# EAGLE board SimulatorT2MRSensorRevD_panel6 (EAGLE 7.7.0)
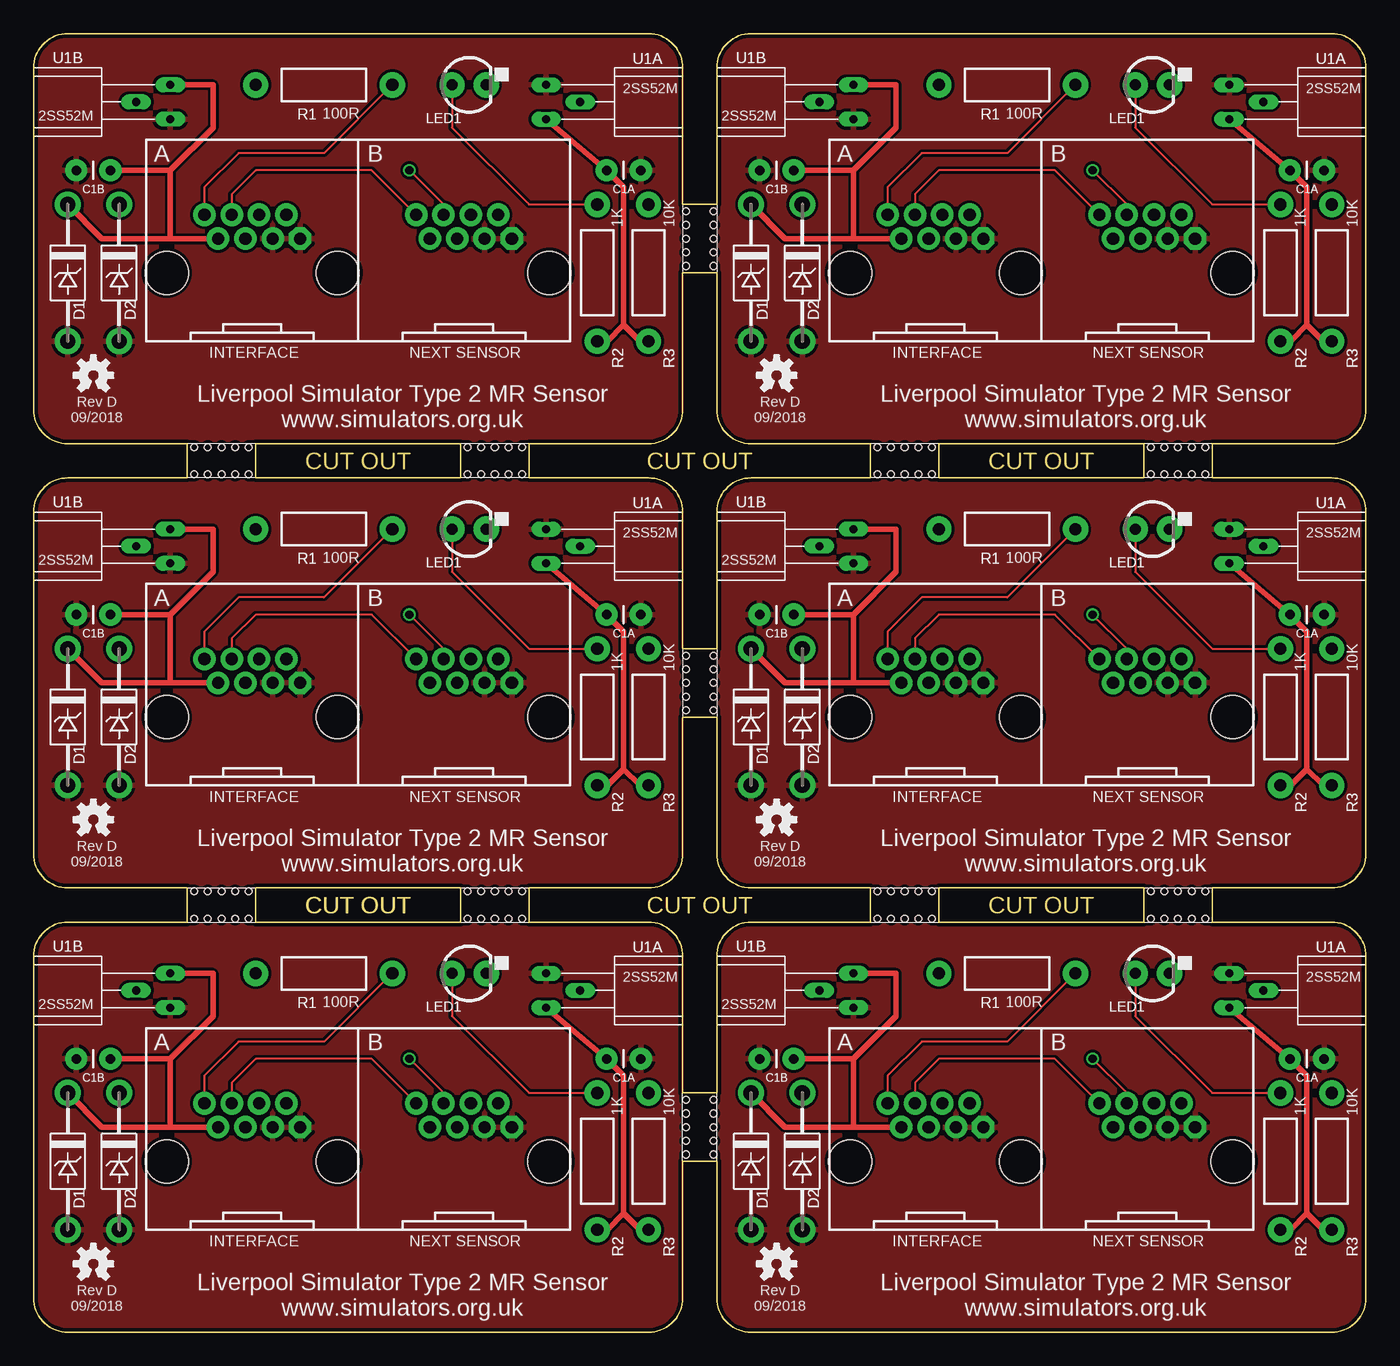
[diagram p0: board, top side]
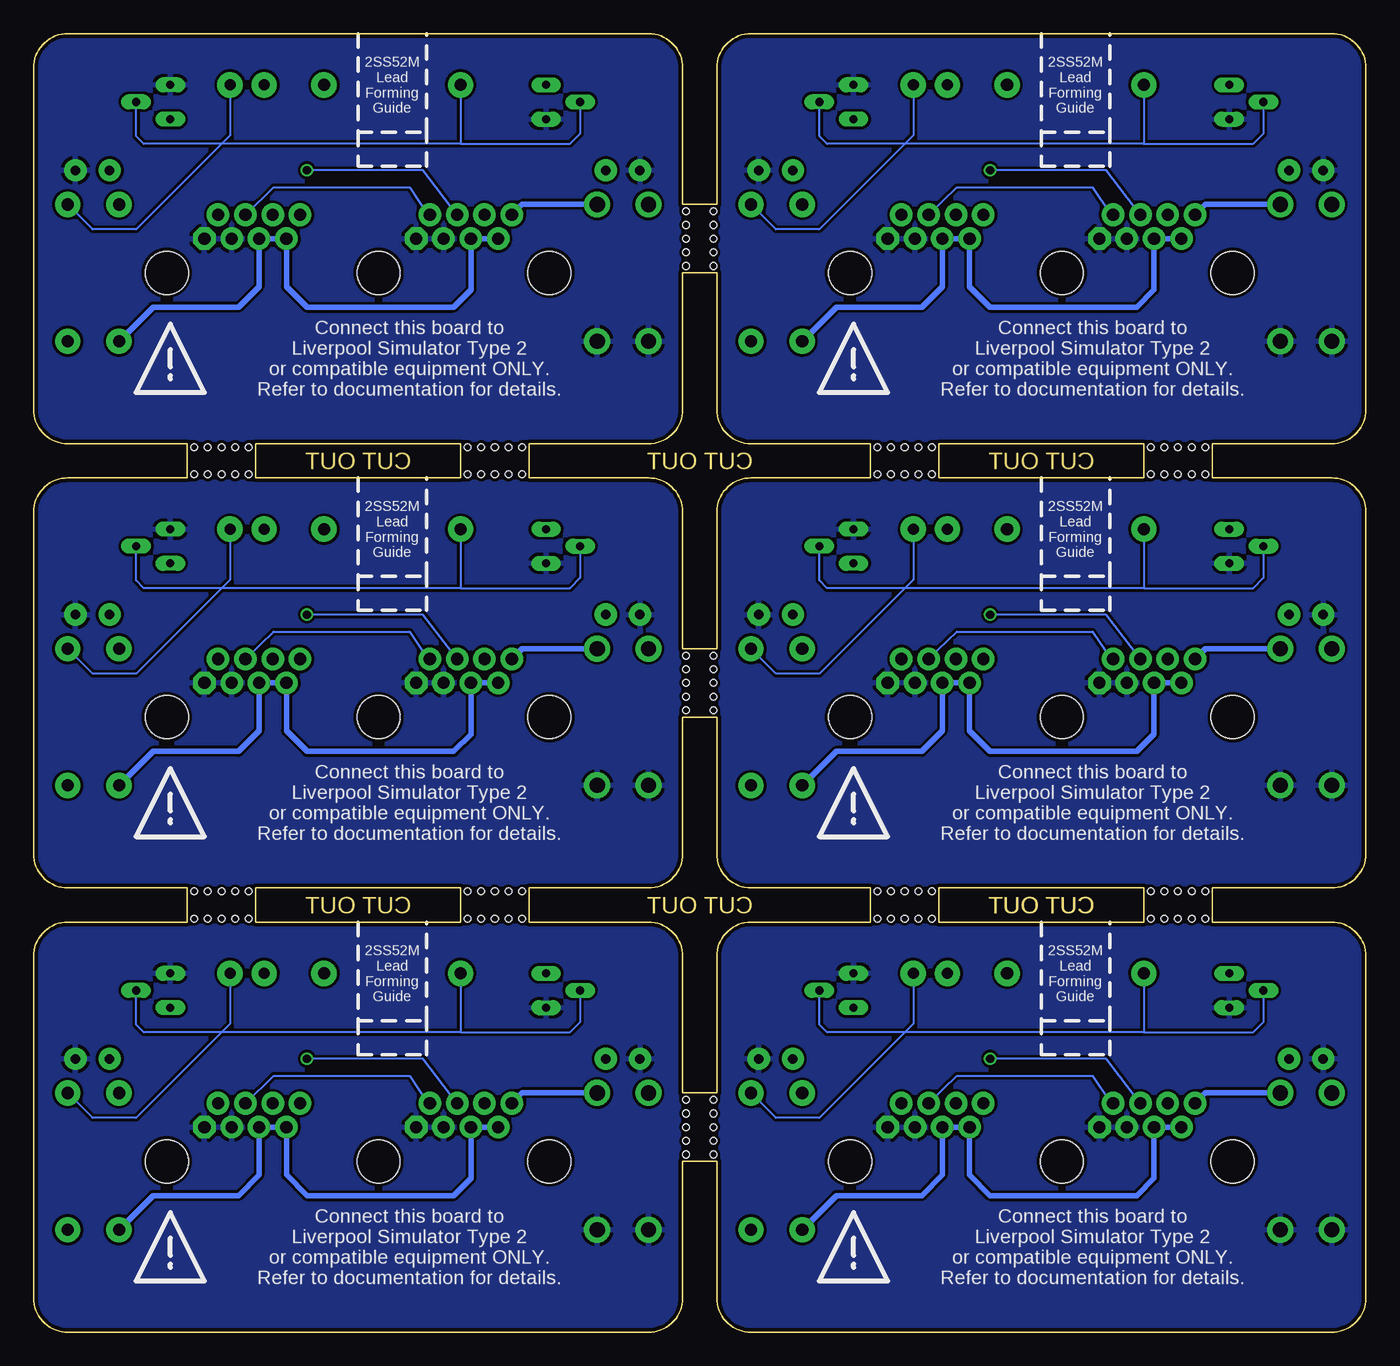
[diagram p1: board, bottom side, seen from below]

Size 99.06 x 96.52 mm. Coordinates in mm from the lower left corner, seen from the top.
Copper layers (1*16): Top 0.035mm / dielectric 1.5mm / Bottom 0.035mm
Design rules "SeeedStudio_2layer_DRU_no_angle_20140221": minimum track width 6mil, minimum drill 12mil, track to track 6mil, track to pad 6mil, pad to pad 6mil, via to via 6mil, smd to smd 0mil, copper to edge 10mil, drill to drill 10mil, minimum pad ring 10mil, minimum via ring 6mil, stop-mask expansion 2mil, vias tented up to drill 100mil, thermal gap 10mil
Net classes: 0 default: clearance 0.205 mm

## Footprints (pad centres in the part's own frame; a part is rotated, then mirrored left to right if it is on the bottom)
CAP-PTH-SMALL = drill 0.7 pad 1.651: 1 0,0; 2 2.54,0
DO41_TVS_UNI = drill 1.118 pad 1.93: ANODE -5.08,0; CATHODE 5.08,0
OUTLINE_PANEL_6_5MM = hole 0.5: 13.97,65.786; 12.954,65.786; 14.986,63.754; 13.97,63.754; 12.954,63.754; 48.514,81.28; 48.514,80.264; 48.514,82.296; 50.546,82.296; 50.546,81.28; 50.546,80.264; 11.938,65.786; 14.986,65.786; 16.002,65.786; 16.002,63.754; 11.938,63.754; 34.29,65.786; 33.274,65.786; 35.306,63.754; 34.29,63.754; 33.274,63.754; 32.258,65.786; 35.306,65.786; 36.322,65.786; 36.322,63.754; 32.258,63.754; 64.77,65.786; 63.754,65.786; 65.786,63.754; 64.77,63.754; 63.754,63.754; 62.738,65.786; 65.786,65.786; 66.802,65.786; 66.802,63.754; 62.738,63.754; 85.09,65.786; 84.074,65.786; 86.106,63.754; 85.09,63.754; 84.074,63.754; 83.058,65.786; 86.106,65.786; 87.122,65.786; 87.122,63.754; 83.058,63.754; 64.77,32.766; 63.754,32.766; 65.786,30.734; 64.77,30.734; 63.754,30.734; 62.738,32.766; 65.786,32.766; 66.802,32.766; 66.802,30.734; 62.738,30.734; 85.09,32.766; 84.074,32.766; 86.106,30.734; 85.09,30.734; 84.074,30.734; 83.058,32.766; 86.106,32.766; 87.122,32.766; 87.122,30.734; 83.058,30.734; 13.97,32.766; 12.954,32.766; 14.986,30.734; 13.97,30.734; 12.954,30.734; 11.938,32.766; 14.986,32.766; 16.002,32.766; 16.002,30.734; 11.938,30.734; 34.29,32.766; 33.274,32.766; 35.306,30.734; 34.29,30.734; 33.274,30.734; 32.258,32.766; 35.306,32.766; 36.322,32.766; 36.322,30.734; 32.258,30.734; 48.514,83.312; 50.546,83.312; 50.546,79.248; 48.514,79.248; 48.514,48.26; 48.514,47.244; 48.514,49.276; 50.546,49.276; 50.546,48.26; 50.546,47.244; 48.514,50.292; 50.546,50.292; 50.546,46.228; 48.514,46.228; 48.514,15.24; 48.514,14.224; 48.514,16.256; 50.546,16.256; 50.546,15.24; 50.546,14.224; 48.514,17.272; 50.546,17.272; 50.546,13.208; 48.514,13.208
RJ45-RJHSE-5080-02-3HOLE = drill 0.9 pad 1.676 octagon: A1 -4.318,2.54; B1 11.43,2.54 | drill 0.9 pad 1.676: A2 -5.334,4.318; A3 -6.35,2.54; A4 -7.366,4.318; A5 -8.382,2.54; A6 -9.398,4.318; A7 -10.414,2.54; A8 -11.43,4.318; B2 10.414,4.318; B3 9.398,2.54; B4 8.382,4.318; B5 7.366,2.54; B6 6.35,4.318; B7 5.334,2.54; B8 4.318,4.318 | hole 3.2: -14.224,0; 14.224,0; -1.524,0
LED3MM = drill 0.813 pad 1.88: A -1.27,0; K 1.27,0
AXIAL-0.4 = drill 0.9 pad 1.88: P$1 -5.08,0; P$2 5.08,0
2SS52M_FLAT_OFFSET = drill 0.6 pad 1.016 long: P$1 -7.62,1.27; P$2 -5.08,0; P$3 -7.62,-1.27

## Placement (x,y rotation side)
C1A  100nF  [CAP-PTH-SMALL]  42.61,20.32 0 top
C1A_1  100nF  [CAP-PTH-SMALL]  42.61,53.34 0 top
C1A_2  100nF  [CAP-PTH-SMALL]  42.61,86.36 0 top
C1A_3  100nF  [CAP-PTH-SMALL]  93.41,20.32 0 top
C1A_4  100nF  [CAP-PTH-SMALL]  93.41,53.34 0 top
C1A_5  100nF  [CAP-PTH-SMALL]  93.41,86.36 0 top
C1B  100nF  [CAP-PTH-SMALL]  5.71,20.32 180 top
C1B_1  100nF  [CAP-PTH-SMALL]  5.71,53.34 180 top
C1B_2  100nF  [CAP-PTH-SMALL]  5.71,86.36 180 top
C1B_3  100nF  [CAP-PTH-SMALL]  56.52,20.32 180 top
C1B_4  100nF  [CAP-PTH-SMALL]  56.52,53.34 180 top
C1B_5  100nF  [CAP-PTH-SMALL]  56.52,86.36 180 top
D1  SA5.0A  [DO41_TVS_UNI]  2.54,12.7 90 top
D1_1  SA5.0A  [DO41_TVS_UNI]  2.54,45.72 90 top
D1_2  SA5.0A  [DO41_TVS_UNI]  2.54,78.74 90 top
D1_3  SA5.0A  [DO41_TVS_UNI]  53.34,12.7 90 top
D1_4  SA5.0A  [DO41_TVS_UNI]  53.34,45.72 90 top
D1_5  SA5.0A  [DO41_TVS_UNI]  53.34,78.74 90 top
D2  SA5.0A  [DO41_TVS_UNI]  6.35,12.7 90 top
D2_1  SA5.0A  [DO41_TVS_UNI]  6.35,45.72 90 top
D2_2  SA5.0A  [DO41_TVS_UNI]  6.35,78.74 90 top
D2_3  SA5.0A  [DO41_TVS_UNI]  57.15,12.7 90 top
D2_4  SA5.0A  [DO41_TVS_UNI]  57.15,45.72 90 top
D2_5  SA5.0A  [DO41_TVS_UNI]  57.15,78.74 90 top
E$1  [WARNING_TRIANGLE_TPLACE]  38.1,3.81 0 bottom
E$2  [WARNING_TRIANGLE_TPLACE]  38.1,36.83 0 bottom
E$3  [WARNING_TRIANGLE_TPLACE]  88.9,36.83 0 bottom
E$4  [WARNING_TRIANGLE_TPLACE]  88.9,3.81 0 bottom
E$5  [WARNING_TRIANGLE_TPLACE]  88.9,69.85 0 bottom
E$6  [WARNING_TRIANGLE_TPLACE]  38.1,69.85 0 bottom
E$12  [OUTLINE_PANEL_6_5MM]  0,0 0 top
JP1  RJ45-RJHSE-5080-023HOLE  [RJ45-RJHSE-5080-02-3HOLE]  24.13,12.7 0 top
JP1_1  RJ45-RJHSE-5080-023HOLE  [RJ45-RJHSE-5080-02-3HOLE]  24.13,45.72 0 top
JP1_2  RJ45-RJHSE-5080-023HOLE  [RJ45-RJHSE-5080-02-3HOLE]  24.13,78.74 0 top
JP1_3  RJ45-RJHSE-5080-023HOLE  [RJ45-RJHSE-5080-02-3HOLE]  74.93,12.7 0 top
JP1_4  RJ45-RJHSE-5080-023HOLE  [RJ45-RJHSE-5080-02-3HOLE]  74.93,45.72 0 top
JP1_5  RJ45-RJHSE-5080-023HOLE  [RJ45-RJHSE-5080-02-3HOLE]  74.93,78.74 0 top
LED1  Blue  [LED3MM]  32.38,26.67 0 top
LED1_1  Blue  [LED3MM]  32.38,59.69 0 top
LED1_2  Blue  [LED3MM]  32.38,92.71 0 top
LED1_3  Blue  [LED3MM]  83.19,26.67 0 top
LED1_4  Blue  [LED3MM]  83.19,59.69 0 top
LED1_5  Blue  [LED3MM]  83.19,92.71 0 top
LOGO1  OSHW-LOGOS  [OSHW-LOGO-S]  4.45,5.08 0 top
LOGO1_1  OSHW-LOGOS  [OSHW-LOGO-S]  4.45,38.1 0 top
LOGO1_2  OSHW-LOGOS  [OSHW-LOGO-S]  4.45,71.12 0 top
LOGO1_3  OSHW-LOGOS  [OSHW-LOGO-S]  55.24,5.08 0 top
LOGO1_4  OSHW-LOGOS  [OSHW-LOGO-S]  55.24,38.1 0 top
LOGO1_5  OSHW-LOGOS  [OSHW-LOGO-S]  55.24,71.12 0 top
R1  100R  [AXIAL-0.4]  21.59,26.67 180 top
R1_1  100R  [AXIAL-0.4]  21.59,59.69 180 top
R1_2  100R  [AXIAL-0.4]  21.59,92.71 180 top
R1_3  100R  [AXIAL-0.4]  72.39,26.67 180 top
R1_4  100R  [AXIAL-0.4]  72.39,59.69 180 top
R1_5  100R  [AXIAL-0.4]  72.39,92.71 180 top
R2  1K  [AXIAL-0.4]  41.91,12.7 270 top
R2_1  1K  [AXIAL-0.4]  41.91,45.72 270 top
R2_2  1K  [AXIAL-0.4]  41.91,78.74 270 top
R2_3  1K  [AXIAL-0.4]  92.71,12.7 270 top
R2_4  1K  [AXIAL-0.4]  92.71,45.72 270 top
R2_5  1K  [AXIAL-0.4]  92.71,78.74 270 top
R3  10K  [AXIAL-0.4]  45.72,12.7 270 top
R3_1  10K  [AXIAL-0.4]  45.72,45.72 270 top
R3_2  10K  [AXIAL-0.4]  45.72,78.74 270 top
R3_3  10K  [AXIAL-0.4]  96.52,12.7 270 top
R3_4  10K  [AXIAL-0.4]  96.52,45.72 270 top
R3_5  10K  [AXIAL-0.4]  96.52,78.74 270 top
U1A  2SS52MOFFSET  [2SS52M_FLAT_OFFSET]  45.72,25.4 0 top
U1A_1  2SS52MOFFSET  [2SS52M_FLAT_OFFSET]  45.72,58.42 0 top
U1A_2  2SS52MOFFSET  [2SS52M_FLAT_OFFSET]  45.72,91.44 0 top
U1A_3  2SS52MOFFSET  [2SS52M_FLAT_OFFSET]  96.52,25.4 0 top
U1A_4  2SS52MOFFSET  [2SS52M_FLAT_OFFSET]  96.52,58.42 0 top
U1A_5  2SS52MOFFSET  [2SS52M_FLAT_OFFSET]  96.52,91.44 0 top
U1B  2SS52MOFFSET  [2SS52M_FLAT_OFFSET]  2.54,25.4 180 top
U1B_1  2SS52MOFFSET  [2SS52M_FLAT_OFFSET]  2.54,58.42 180 top
U1B_2  2SS52MOFFSET  [2SS52M_FLAT_OFFSET]  2.54,91.44 180 top
U1B_3  2SS52MOFFSET  [2SS52M_FLAT_OFFSET]  53.34,25.4 180 top
U1B_4  2SS52MOFFSET  [2SS52M_FLAT_OFFSET]  53.34,58.42 180 top
U1B_5  2SS52MOFFSET  [2SS52M_FLAT_OFFSET]  53.34,91.44 180 top

## Library data of the parts
C1A C1B R1-R3 = SparkFun-Passives
C1A_1-C1A_5 = SparkFun-Passives; NAME1: C1A
C1B_1-C1B_5 = SparkFun-Passives; NAME1: C1B
D1 D2 E$1-E$6 E$12 JP1 JP1_1-JP1_5 U1A U1B = AIC_Custom
D1_1-D1_5 = AIC_Custom; NAME1: D1
D2_1-D2_5 = AIC_Custom; NAME1: D2
LED1 = SparkFun-LED
LED1_1-LED1_5 = SparkFun-LED; NAME1: LED1
LOGO1 LOGO1_1-LOGO1_5 = SparkFun-Aesthetics
R1_1-R1_5 = SparkFun-Passives; NAME1: R1
R2_1-R2_5 = SparkFun-Passives; NAME1: R2
R3_1-R3_5 = SparkFun-Passives; NAME1: R3
U1A_1-U1A_5 = AIC_Custom; NAME1: U1A
U1B_1-U1B_5 = AIC_Custom; NAME1: U1B

## Nets
!OUT!: D2.CATHODE JP1.A8 R1.P$1
!OUT!1: D2_1.CATHODE JP1_1.A8 R1_1.P$1
!OUT!2: D2_2.CATHODE JP1_2.A8 R1_2.P$1
!OUT!3: D2_3.CATHODE JP1_3.A8 R1_3.P$1
!OUT!4: D2_4.CATHODE JP1_4.A8 R1_4.P$1
!OUT!5: D2_5.CATHODE JP1_5.A8 R1_5.P$1
B2: JP1.A6 JP1.B8
B3: JP1.A4 JP1.B6
B4: JP1.A2 JP1.B4
B21: JP1_1.A6 JP1_1.B8
B22: JP1_2.A6 JP1_2.B8
B23: JP1_3.A6 JP1_3.B8
B24: JP1_4.A6 JP1_4.B8
B25: JP1_5.A6 JP1_5.B8
B31: JP1_1.A4 JP1_1.B6
B32: JP1_2.A4 JP1_2.B6
B33: JP1_3.A4 JP1_3.B6
B34: JP1_4.A4 JP1_4.B6
B35: JP1_5.A4 JP1_5.B6
B41: JP1_1.A2 JP1_1.B4
B42: JP1_2.A2 JP1_2.B4
B43: JP1_3.A2 JP1_3.B4
B44: JP1_4.A2 JP1_4.B4
B45: JP1_5.A2 JP1_5.B4
GND: C1A.2 C1B.2 D1.ANODE D2.ANODE JP1.A1 JP1.A3 JP1.B1 JP1.B3 U1A.P$1 U1B.P$1
GND1: C1A_1.2 C1B_1.2 D1_1.ANODE D2_1.ANODE JP1_1.A1 JP1_1.A3 JP1_1.B1 JP1_1.B3 U1A_1.P$1 U1B_1.P$1
GND2: C1A_2.2 C1B_2.2 D1_2.ANODE D2_2.ANODE JP1_2.A1 JP1_2.A3 JP1_2.B1 JP1_2.B3 U1A_2.P$1 U1B_2.P$1
GND3: C1A_3.2 C1B_3.2 D1_3.ANODE D2_3.ANODE JP1_3.A1 JP1_3.A3 JP1_3.B1 JP1_3.B3 U1A_3.P$1 U1B_3.P$1
GND4: C1A_4.2 C1B_4.2 D1_4.ANODE D2_4.ANODE JP1_4.A1 JP1_4.A3 JP1_4.B1 JP1_4.B3 U1A_4.P$1 U1B_4.P$1
GND5: C1A_5.2 C1B_5.2 D1_5.ANODE D2_5.ANODE JP1_5.A1 JP1_5.A3 JP1_5.B1 JP1_5.B3 U1A_5.P$1 U1B_5.P$1
LED: LED1.A R2.P$1
LED1: LED1_1.A R2_1.P$1
LED2: LED1_2.A R2_2.P$1
LED3: LED1_3.A R2_3.P$1
LED4: LED1_4.A R2_4.P$1
LED5: LED1_5.A R2_5.P$1
SIG: LED1.K R1.P$2 R3.P$1 U1A.P$2 U1B.P$2
SIG1: LED1_1.K R1_1.P$2 R3_1.P$1 U1A_1.P$2 U1B_1.P$2
SIG2: LED1_2.K R1_2.P$2 R3_2.P$1 U1A_2.P$2 U1B_2.P$2
SIG3: LED1_3.K R1_3.P$2 R3_3.P$1 U1A_3.P$2 U1B_3.P$2
SIG4: LED1_4.K R1_4.P$2 R3_4.P$1 U1A_4.P$2 U1B_4.P$2
SIG5: LED1_5.K R1_5.P$2 R3_5.P$1 U1A_5.P$2 U1B_5.P$2
VCC: C1A.1 C1B.1 D1.CATHODE JP1.A5 JP1.A7 JP1.B5 JP1.B7 R2.P$2 R3.P$2 U1A.P$3 U1B.P$3
VCC1: C1A_1.1 C1B_1.1 D1_1.CATHODE JP1_1.A5 JP1_1.A7 JP1_1.B5 JP1_1.B7 R2_1.P$2 R3_1.P$2 U1A_1.P$3 U1B_1.P$3
VCC2: C1A_2.1 C1B_2.1 D1_2.CATHODE JP1_2.A5 JP1_2.A7 JP1_2.B5 JP1_2.B7 R2_2.P$2 R3_2.P$2 U1A_2.P$3 U1B_2.P$3
VCC3: C1A_3.1 C1B_3.1 D1_3.CATHODE JP1_3.A5 JP1_3.A7 JP1_3.B5 JP1_3.B7 R2_3.P$2 R3_3.P$2 U1A_3.P$3 U1B_3.P$3
VCC4: C1A_4.1 C1B_4.1 D1_4.CATHODE JP1_4.A5 JP1_4.A7 JP1_4.B5 JP1_4.B7 R2_4.P$2 R3_4.P$2 U1A_4.P$3 U1B_4.P$3
VCC5: C1A_5.1 C1B_5.1 D1_5.CATHODE JP1_5.A5 JP1_5.A7 JP1_5.B5 JP1_5.B7 R2_5.P$2 R3_5.P$2 U1A_5.P$3 U1B_5.P$3

## Tracks (layer width: path | path; a pad name or v marks a point on that pad's centre or on a via)
!OUT!
  Top 0.152: R1.P$1 21.59,21.59 15.24,21.59 12.7,19.05 JP1.A8
  Bottom 0.152: 12.7,17.14 JP1.A8
  Bottom 0.406: D2.CATHODE 11.94,17.78 JP1.A8
!OUT!1
  Top 0.152: R1_1.P$1 21.59,54.61 15.24,54.61 12.7,52.07 JP1_1.A8
  Bottom 0.152: 12.7,50.16 JP1_1.A8
  Bottom 0.406: D2_1.CATHODE 11.94,50.8 JP1_1.A8
!OUT!2
  Top 0.152: R1_2.P$1 21.59,87.63 15.24,87.63 12.7,85.09 JP1_2.A8
  Bottom 0.152: 12.7,83.19 JP1_2.A8
  Bottom 0.406: D2_2.CATHODE 11.94,83.82 JP1_2.A8
!OUT!3
  Top 0.152: R1_3.P$1 72.39,21.59 66.04,21.59 63.5,19.05 JP1_3.A8
  Bottom 0.152: 63.5,17.14 JP1_3.A8
  Bottom 0.406: D2_3.CATHODE 62.74,17.78 JP1_3.A8
!OUT!4
  Top 0.152: R1_4.P$1 72.39,54.61 66.04,54.61 63.5,52.07 JP1_4.A8
  Bottom 0.152: 63.5,50.16 JP1_4.A8
  Bottom 0.406: D2_4.CATHODE 62.74,50.8 JP1_4.A8
!OUT!5
  Top 0.152: R1_5.P$1 72.39,87.63 66.04,87.63 63.5,85.09 JP1_5.A8
  Bottom 0.152: 63.5,83.19 JP1_5.A8
  Bottom 0.406: D2_5.CATHODE 62.74,83.82 JP1_5.A8
B2
  Top 0.152: JP1.B8 25.15,20.32 16.51,20.32 14.73,18.54 JP1.A6
B3  (via drill 0.6 pad 0.25)
  Top 0.152: v27.94,20.32 30.48,17.78 JP1.B6
  Bottom 0.152: JP1.A4 19.3,20.32 v27.94,20.32
B4
  Bottom 0.152: JP1.B4 30.42,19.05 20.32,19.05 19.05,17.14 JP1.A2
B21
  Top 0.152: JP1_1.B8 25.15,53.34 16.51,53.34 14.73,51.56 JP1_1.A6
B22
  Top 0.152: JP1_2.B8 25.15,86.36 16.51,86.36 14.73,84.58 JP1_2.A6
B23
  Top 0.152: JP1_3.B8 75.95,20.32 67.31,20.32 65.53,18.54 JP1_3.A6
B24
  Top 0.152: JP1_4.B8 75.95,53.34 67.31,53.34 65.53,51.56 JP1_4.A6
B25
  Top 0.152: JP1_5.B8 75.95,86.36 67.31,86.36 65.53,84.58 JP1_5.A6
B31  (via drill 0.6 pad 0.25)
  Top 0.152: v27.94,53.34 30.48,50.8 JP1_1.B6
  Bottom 0.152: JP1_1.A4 19.3,53.34 v27.94,53.34
B32  (via drill 0.6 pad 0.25)
  Top 0.152: v27.94,86.36 30.48,83.82 JP1_2.B6
  Bottom 0.152: JP1_2.A4 19.3,86.36 v27.94,86.36
B33  (via drill 0.6 pad 0.25)
  Top 0.152: v78.74,20.32 81.28,17.78 JP1_3.B6
  Bottom 0.152: JP1_3.A4 70.1,20.32 v78.74,20.32
B34  (via drill 0.6 pad 0.25)
  Top 0.152: v78.74,53.34 81.28,50.8 JP1_4.B6
  Bottom 0.152: JP1_4.A4 70.1,53.34 v78.74,53.34
B35  (via drill 0.6 pad 0.25)
  Top 0.152: v78.74,86.36 81.28,83.82 JP1_5.B6
  Bottom 0.152: JP1_5.A4 70.1,86.36 v78.74,86.36
B41
  Bottom 0.152: JP1_1.B4 30.42,52.07 20.32,52.07 19.05,50.16 JP1_1.A2
B42
  Bottom 0.152: JP1_2.B4 30.42,85.09 20.32,85.09 19.05,83.19 JP1_2.A2
B43
  Bottom 0.152: JP1_3.B4 81.22,19.05 71.12,19.05 69.85,17.14 JP1_3.A2
B44
  Bottom 0.152: JP1_4.B4 81.22,52.07 71.12,52.07 69.85,50.16 JP1_4.A2
B45
  Bottom 0.152: JP1_5.B4 81.22,85.09 71.12,85.09 69.85,83.19 JP1_5.A2
GND
  pour Top: 2.54,30.48 45.72,30.48 arc-90 48.26,27.94 48.26,2.54 arc-90 45.72,0 2.54,0 arc-90 0,2.54 0,27.94 arc-90
  pour Bottom: 2.54,30.48 45.72,30.48 arc-90 48.26,27.94 48.26,2.54 arc-90 45.72,0 2.54,0 arc-90 0,2.54 0,27.94 arc-90
GND1
  pour Top: 2.54,63.5 45.72,63.5 arc-90 48.26,60.96 48.26,35.56 arc-90 45.72,33.02 2.54,33.02 arc-90 0,35.56 0,60.96 arc-90
  pour Bottom: 2.54,63.5 45.72,63.5 arc-90 48.26,60.96 48.26,35.56 arc-90 45.72,33.02 2.54,33.02 arc-90 0,35.56 0,60.96 arc-90
GND2
  pour Top: 2.54,96.52 45.72,96.52 arc-90 48.26,93.98 48.26,68.58 arc-90 45.72,66.04 2.54,66.04 arc-90 0,68.58 0,93.98 arc-90
  pour Bottom: 2.54,96.52 45.72,96.52 arc-90 48.26,93.98 48.26,68.58 arc-90 45.72,66.04 2.54,66.04 arc-90 0,68.58 0,93.98 arc-90
GND3
  pour Top: 53.34,30.48 96.52,30.48 arc-90 99.06,27.94 99.06,2.54 arc-90 96.52,0 53.34,0 arc-90 50.8,2.54 50.8,27.94 arc-90
  pour Bottom: 53.34,30.48 96.52,30.48 arc-90 99.06,27.94 99.06,2.54 arc-90 96.52,0 53.34,0 arc-90 50.8,2.54 50.8,27.94 arc-90
GND4
  pour Top: 53.34,63.5 96.52,63.5 arc-90 99.06,60.96 99.06,35.56 arc-90 96.52,33.02 53.34,33.02 arc-90 50.8,35.56 50.8,60.96 arc-90
  pour Bottom: 53.34,63.5 96.52,63.5 arc-90 99.06,60.96 99.06,35.56 arc-90 96.52,33.02 53.34,33.02 arc-90 50.8,35.56 50.8,60.96 arc-90
GND5
  pour Top: 53.34,96.52 96.52,96.52 arc-90 99.06,93.98 99.06,68.58 arc-90 96.52,66.04 53.34,66.04 arc-90 50.8,68.58 50.8,93.98 arc-90
  pour Bottom: 53.34,96.52 96.52,96.52 arc-90 99.06,93.98 99.06,68.58 arc-90 96.52,66.04 53.34,66.04 arc-90 50.8,68.58 50.8,93.98 arc-90
LED
  Top 0.152: LED1.A 31.11,23.5 36.83,17.78 R2.P$1
LED1
  Top 0.152: LED1_1.A 31.11,56.52 36.83,50.8 R2_1.P$1
LED2
  Top 0.152: LED1_2.A 31.11,89.53 36.83,83.82 R2_2.P$1
LED3
  Top 0.152: LED1_3.A 81.92,23.5 87.63,17.78 R2_3.P$1
LED4
  Top 0.152: LED1_4.A 81.92,56.52 87.63,50.8 R2_4.P$1
LED5
  Top 0.152: LED1_5.A 81.92,89.53 87.63,83.82 R2_5.P$1
SIG
  Bottom 0.152: 16.51,22.29 8.38,22.29 7.62,23.05 U1B.P$2 | 16.51,22.29 34.29,22.29 | R1.P$2 16.51,22.29 | 34.29,22.29 40.07,22.29 40.64,22.86 U1A.P$2 | 34.29,22.29 40.64,15.94 43.88,15.94 R3.P$1 | LED1.K 33.66,22.92 34.29,22.29
SIG1
  Bottom 0.152: 16.51,55.31 8.38,55.31 7.62,56.07 U1B_1.P$2 | 16.51,55.31 34.29,55.31 | R1_1.P$2 16.51,55.31 | 34.29,55.31 40.07,55.31 40.64,55.88 U1A_1.P$2 | 34.29,55.31 40.64,48.96 43.88,48.96 R3_1.P$1 | LED1_1.K 33.66,55.94 34.29,55.31
SIG2
  Bottom 0.152: 16.51,88.33 8.38,88.33 7.62,89.09 U1B_2.P$2 | 16.51,88.33 34.29,88.33 | R1_2.P$2 16.51,88.33 | 34.29,88.33 40.07,88.33 40.64,88.9 U1A_2.P$2 | 34.29,88.33 40.64,81.98 43.88,81.98 R3_2.P$1 | LED1_2.K 33.66,88.96 34.29,88.33
SIG3
  Bottom 0.152: 67.31,22.29 59.18,22.29 58.42,23.05 U1B_3.P$2 | 67.31,22.29 85.09,22.29 | R1_3.P$2 67.31,22.29 | 85.09,22.29 90.87,22.29 91.44,22.86 U1A_3.P$2 | 85.09,22.29 91.44,15.94 94.68,15.94 R3_3.P$1 | LED1_3.K 84.45,22.92 85.09,22.29
SIG4
  Bottom 0.152: 67.31,55.31 59.18,55.31 58.42,56.07 U1B_4.P$2 | 67.31,55.31 85.09,55.31 | R1_4.P$2 67.31,55.31 | 85.09,55.31 90.87,55.31 91.44,55.88 U1A_4.P$2 | 85.09,55.31 91.44,48.96 94.68,48.96 R3_4.P$1 | LED1_4.K 84.45,55.94 85.09,55.31
SIG5
  Bottom 0.152: 67.31,88.33 59.18,88.33 58.42,89.09 U1B_5.P$2 | 67.31,88.33 85.09,88.33 | R1_5.P$2 67.31,88.33 | 85.09,88.33 90.87,88.33 91.44,88.9 U1A_5.P$2 | 85.09,88.33 91.44,81.98 94.68,81.98 R3_5.P$1 | LED1_5.K 84.45,88.96 85.09,88.33
VCC
  Top 0.406: U1B.P$3 13.34,26.67 13.34,23.5 10.16,20.32 | U1A.P$3 C1A.1 43.88,19.05 43.88,8.83 | 10.16,15.24 JP1.A7 | 10.16,20.32 10.16,15.24 | D1.CATHODE 5.08,15.24 10.16,15.24 | C1B.1 10.16,20.32 | 43.88,8.83 42.67,7.62 R2.P$2 | 43.88,8.83 45.09,7.62 R3.P$2
  Bottom 0.406: JP1.A7 JP1.A5 15.75,11.43 17.02,10.16 27.94,10.16 29.46,11.68 JP1.B7 JP1.B5 31.5,11.68 33.02,10.16 39.37,10.16 R2.P$2
VCC1
  Top 0.406: U1B_1.P$3 13.34,59.69 13.34,56.52 10.16,53.34 | U1A_1.P$3 C1A_1.1 43.88,52.07 43.88,41.85 | 10.16,48.26 JP1_1.A7 | 10.16,53.34 10.16,48.26 | D1_1.CATHODE 5.08,48.26 10.16,48.26 | C1B_1.1 10.16,53.34 | 43.88,41.85 42.67,40.64 R2_1.P$2 | 43.88,41.85 45.09,40.64 R3_1.P$2
  Bottom 0.406: JP1_1.A7 JP1_1.A5 15.75,44.45 17.02,43.18 27.94,43.18 29.46,44.7 JP1_1.B7 JP1_1.B5 31.5,44.7 33.02,43.18 39.37,43.18 R2_1.P$2
VCC2
  Top 0.406: U1B_2.P$3 13.34,92.71 13.34,89.53 10.16,86.36 | U1A_2.P$3 C1A_2.1 43.88,85.09 43.88,74.87 | 10.16,81.28 JP1_2.A7 | 10.16,86.36 10.16,81.28 | D1_2.CATHODE 5.08,81.28 10.16,81.28 | C1B_2.1 10.16,86.36 | 43.88,74.87 42.67,73.66 R2_2.P$2 | 43.88,74.87 45.09,73.66 R3_2.P$2
  Bottom 0.406: JP1_2.A7 JP1_2.A5 15.75,77.47 17.02,76.2 27.94,76.2 29.46,77.72 JP1_2.B7 JP1_2.B5 31.5,77.72 33.02,76.2 39.37,76.2 R2_2.P$2
VCC3
  Top 0.406: U1B_3.P$3 64.14,26.67 64.14,23.5 60.96,20.32 | U1A_3.P$3 C1A_3.1 94.68,19.05 94.68,8.83 | 60.96,15.24 JP1_3.A7 | 60.96,20.32 60.96,15.24 | D1_3.CATHODE 55.88,15.24 60.96,15.24 | C1B_3.1 60.96,20.32 | 94.68,8.83 93.47,7.62 R2_3.P$2 | 94.68,8.83 95.89,7.62 R3_3.P$2
  Bottom 0.406: JP1_3.A7 JP1_3.A5 66.55,11.43 67.82,10.16 78.74,10.16 80.26,11.68 JP1_3.B7 JP1_3.B5 82.3,11.68 83.82,10.16 90.17,10.16 R2_3.P$2
VCC4
  Top 0.406: U1B_4.P$3 64.14,59.69 64.14,56.52 60.96,53.34 | U1A_4.P$3 C1A_4.1 94.68,52.07 94.68,41.85 | 60.96,48.26 JP1_4.A7 | 60.96,53.34 60.96,48.26 | D1_4.CATHODE 55.88,48.26 60.96,48.26 | C1B_4.1 60.96,53.34 | 94.68,41.85 93.47,40.64 R2_4.P$2 | 94.68,41.85 95.89,40.64 R3_4.P$2
  Bottom 0.406: JP1_4.A7 JP1_4.A5 66.55,44.45 67.82,43.18 78.74,43.18 80.26,44.7 JP1_4.B7 JP1_4.B5 82.3,44.7 83.82,43.18 90.17,43.18 R2_4.P$2
VCC5
  Top 0.406: U1B_5.P$3 64.14,92.71 64.14,89.53 60.96,86.36 | U1A_5.P$3 C1A_5.1 94.68,85.09 94.68,74.87 | 60.96,81.28 JP1_5.A7 | 60.96,86.36 60.96,81.28 | D1_5.CATHODE 55.88,81.28 60.96,81.28 | C1B_5.1 60.96,86.36 | 94.68,74.87 93.47,73.66 R2_5.P$2 | 94.68,74.87 95.89,73.66 R3_5.P$2
  Bottom 0.406: JP1_5.A7 JP1_5.A5 66.55,77.47 67.82,76.2 78.74,76.2 80.26,77.72 JP1_5.B7 JP1_5.B5 82.3,77.72 83.82,76.2 90.17,76.2 R2_5.P$2

## Text on the board
Dimension: CUT OUT
tPlace: INTERFACE | NEXT SENSOR | INTERFACE | NEXT SENSOR | Liverpool Simulator Type 2 MR Sensor / www.simulators.org.uk | Liverpool Simulator Type 2 MR Sensor / www.simulators.org.uk | Rev D / 09/2018 | Rev D / 09/2018 | INTERFACE | NEXT SENSOR | INTERFACE | NEXT SENSOR | Liverpool Simulator Type 2 MR Sensor / www.simulators.org.uk | Liverpool Simulator Type 2 MR Sensor / www.simulators.org.uk | Rev D / 09/2018 | Rev D / 09/2018 | INTERFACE | NEXT SENSOR | INTERFACE | NEXT SENSOR | Liverpool Simulator Type 2 MR Sensor / www.simulators.org.uk | Liverpool Simulator Type 2 MR Sensor / www.simulators.org.uk | Rev D / 09/2018 | Rev D / 09/2018
bPlace: 2SS52M / Lead / Forming / Guide | 2SS52M / Lead / Forming / Guide | Connect this board to / Liverpool Simulator Type 2 / or compatible equipment ONLY. / Refer to documentation for details. | Connect this board to / Liverpool Simulator Type 2 / or compatible equipment ONLY. / Refer to documentation for details. | 2SS52M / Lead / Forming / Guide | 2SS52M / Lead / Forming / Guide | Connect this board to / Liverpool Simulator Type 2 / or compatible equipment ONLY. / Refer to documentation for details. | Connect this board to / Liverpool Simulator Type 2 / or compatible equipment ONLY. / Refer to documentation for details. | 2SS52M / Lead / Forming / Guide | 2SS52M / Lead / Forming / Guide | Connect this board to / Liverpool Simulator Type 2 / or compatible equipment ONLY. / Refer to documentation for details. | Connect this board to / Liverpool Simulator Type 2 / or compatible equipment ONLY. / Refer to documentation for details.
_tNames: U1B | U1A | U1B | U1A | R1 | LED1 | R1 | LED1 | C1B | C1A | C1B | C1A | D1 | D2 | D1 | D2 | R2 | R3 | R2 | R3 | U1B | U1A | U1B | U1A | R1 | LED1 | R1 | LED1 | C1B | C1A | C1B | C1A | D1 | D2 | D1 | D2 | R2 | R3 | R2 | R3 | U1B | U1A | U1B | U1A | R1 | LED1 | R1 | LED1 | C1B | C1A | C1B | C1A | D1 | D2 | D1 | D2 | R2 | R3 | R2 | R3